# EAGLE board ir_shield (EAGLE 7.1.0)
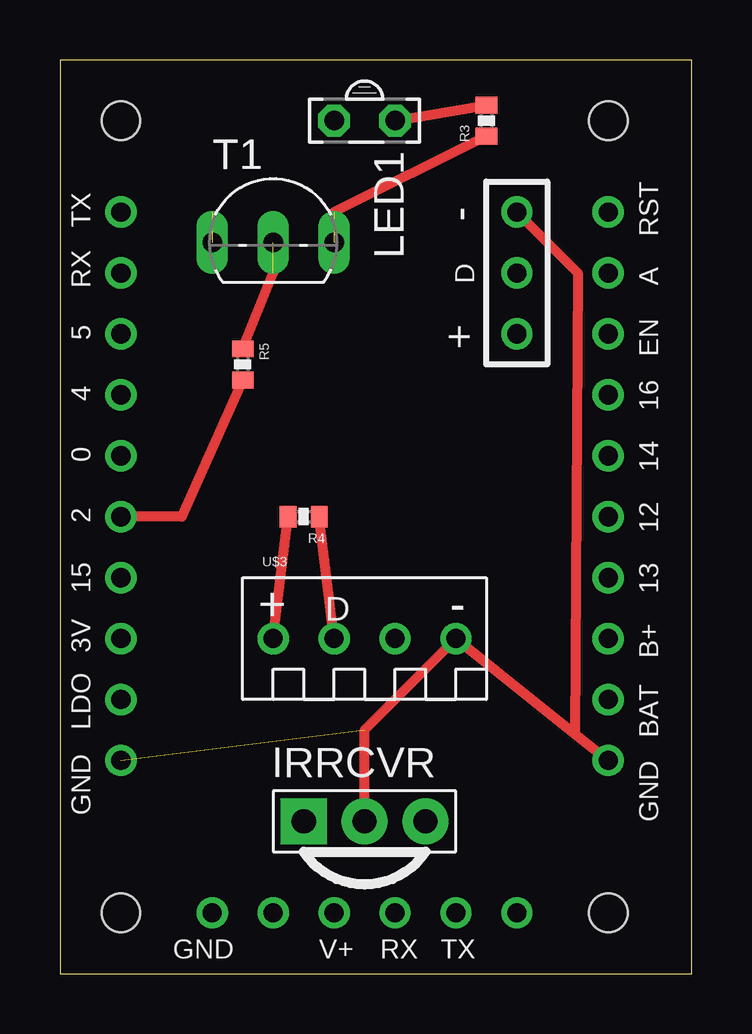
[diagram p0: board, top side]
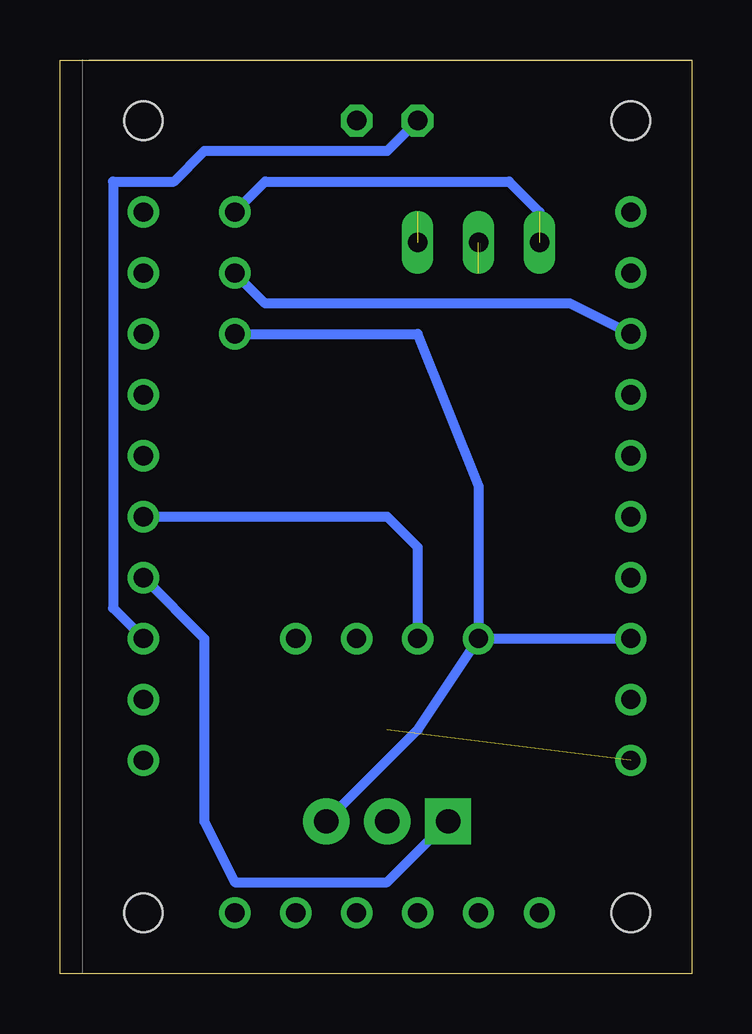
[diagram p1: board, bottom side, seen from below]

Size 26.34 x 38.09 mm. Coordinates in mm from the lower left corner, seen from the top.
Outline: 0,0 26.34,0 26.34,38.09 0,38.09 0,0
Copper layers (1*16): Top 0.035mm / dielectric 1.5mm / Bottom 0.035mm
Design rules "default": minimum track width 10mil, minimum drill 24mil, track to track 8mil, track to pad 8mil, pad to pad 8mil, via to via 8mil, smd to smd 8mil, copper to edge 40mil, drill to drill 8mil, minimum pad ring 10mil, minimum via ring 8mil, stop-mask expansion 4mil, vias tented up to drill 0mil, thermal gap 10mil

## Footprints (pad centres in the part's own frame; a part is rotated, then mirrored left to right if it is on the bottom)
PNA460XM = drill 1.016 pad 1.93 square: 1 -2.54,0 | drill 1.016 pad 1.93: 2 0,0; 3 2.54,0
IRL80A = drill 0.813 octagon: A 0,-1.27; K 0,1.27
0402-RES = smd 0.7 x 0.9: 1 -0.65,0; 2 0.65,0
TO92-EBC-OVAL = drill 0.813 long: B 0,-1.27; C 2.54,-1.27; E -2.54,-1.27
HUZZAH_OUTSIDE = drill 0.8: 3V 2.54,13.97; 12 22.86,19.05; 13 22.86,16.51; 14 22.86,21.59; 15 2.54,16.51; 16 22.86,24.13; #0 2.54,21.59; #2 2.54,19.05; #4 2.54,24.13; #5 2.54,26.67; A 22.86,29.21; BAT 22.86,11.43; COM_GND 6.35,2.54; COM_RX 13.97,2.54; COM_TX 16.51,2.54; COM_V+ 11.43,2.54; EN 22.86,26.67; GND 2.54,8.89; GND2 22.86,8.89; LDO 2.54,11.43; NC1 8.89,2.54; NC2 19.05,2.54; RST 22.86,31.75; RX 2.54,29.21; TX 2.54,31.75; V+ 22.86,13.97 | hole 1.6: 2.54,35.56; 22.86,35.56; 2.54,2.54; 22.86,2.54
DHT11-VERT = drill 0.8: DATA -1.27,0; GND 3.81,0; NC 1.27,0; VCC -3.81,0
3_PIN_HEADER = drill 0.8: + -2.54,-1.27; - 2.54,-1.27; D 0,-1.27

## Placement (x,y rotation side)
IRRCVR  PNA460XM  [PNA460XM]  12.7,6.35 0 top
LED1  [IRL80A]  12.7,35.56 270 top
R3  10  [0402-RES]  17.78,35.56 90 top
R4  25k  [0402-RES]  10.16,19.05 180 top
R5  1K  [0402-RES]  7.62,25.4 270 top
T1  2N2222  [TO92-EBC-OVAL]  8.89,31.75 0 top
U$1  HUZZAH_SHIELDOUTSIDE  [HUZZAH_OUTSIDE]  0,0 0 top
U$3  DHT11VERT  [DHT11-VERT]  12.7,13.97 0 top
U$4  PIR  [3_PIN_HEADER]  17.78,29.21 90 top

## Library data of the parts
IRRCVR LED1 T1 = adafruit
R3-R5 = SparkFun-Passives
U$1 U$3 U$4 = DZ

## Nets
+3V3: IRRCVR.3 R4.2 U$1.3V U$3.VCC U$4.+
+5V: LED1.A U$1.V+
GND: IRRCVR.2 T1.E U$1.GND U$1.GND2 U$3.GND U$4.-
N$1: LED1.K R3.2
N$2: R3.1 T1.C
N$3: R5.1 T1.B
N$4: R5.2 U$1.#2
N$5: IRRCVR.1 U$1.13
N$6: R4.1 U$1.12 U$3.DATA
N$7: U$1.#5 U$4.D

## Tracks (layer width: path | path; a pad name or v marks a point on that pad's centre or on a via)
+3V3
  Top 0.406: U$3.VCC R4.2
  Bottom 0.406: U$3.VCC U$1.3V | U$3.VCC 11.43,10.16 IRRCVR.3 | U$4.+ 11.43,26.67 8.89,20.32 U$3.VCC
+5V
  Bottom 0.406: LED1.A 12.7,34.29 20.32,34.29 21.59,33.02 24.13,33.02 24.13,15.24 U$1.V+
GND  (2 unrouted)
  Top 0.406: IRRCVR.2 12.7,10.16 U$3.GND 21.47,10.01 | 21.47,10.01 U$1.GND2 | U$4.- 21.59,29.21 21.47,10.01
  Bottom 0.406: U$4.- 17.78,33.02 7.62,33.02 6.35,31.75
N$1
  Top 0.406: LED1.K R3.2
N$2  (1 unrouted)
  Top 0.406: R3.1 11.43,31.75
N$3  (1 unrouted)
  Top 0.406: R5.1 8.89,29.21
N$4
  Top 0.406: R5.2 5.08,19.05 U$1.#2
N$5
  Bottom 0.406: U$1.13 20.32,13.97 20.32,6.35 19.05,3.81 12.7,3.81 IRRCVR.1
N$6
  Top 0.406: U$3.DATA R4.1
  Bottom 0.406: U$1.12 12.7,19.05 11.43,17.78 U$3.DATA
N$7
  Bottom 0.406: U$1.#5 5.08,27.94 17.78,27.94 U$4.D